# Allegro board balance_new.brd
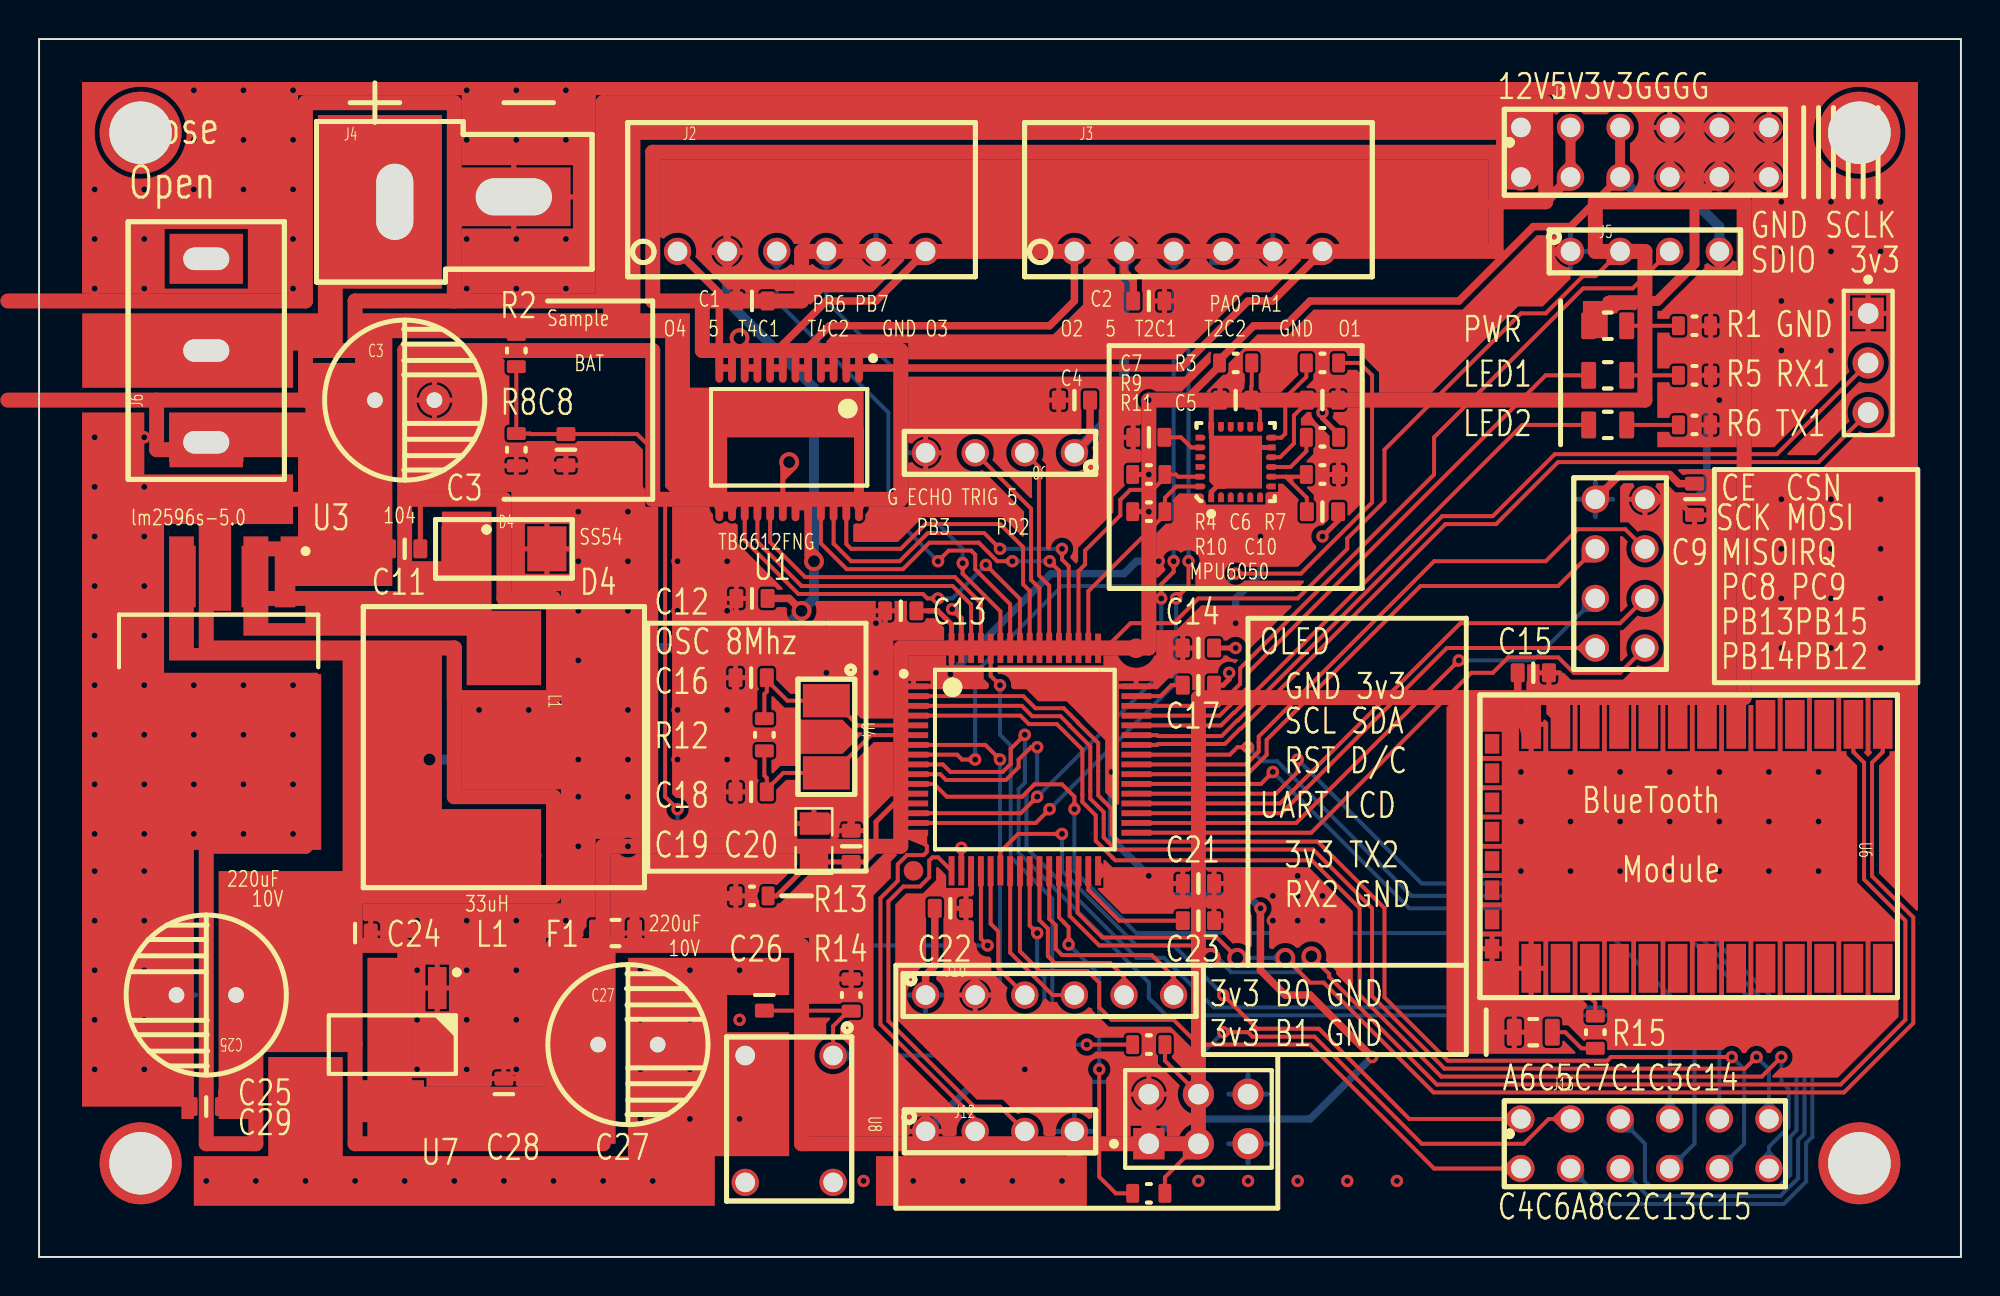
[diagram p0: board, top side]
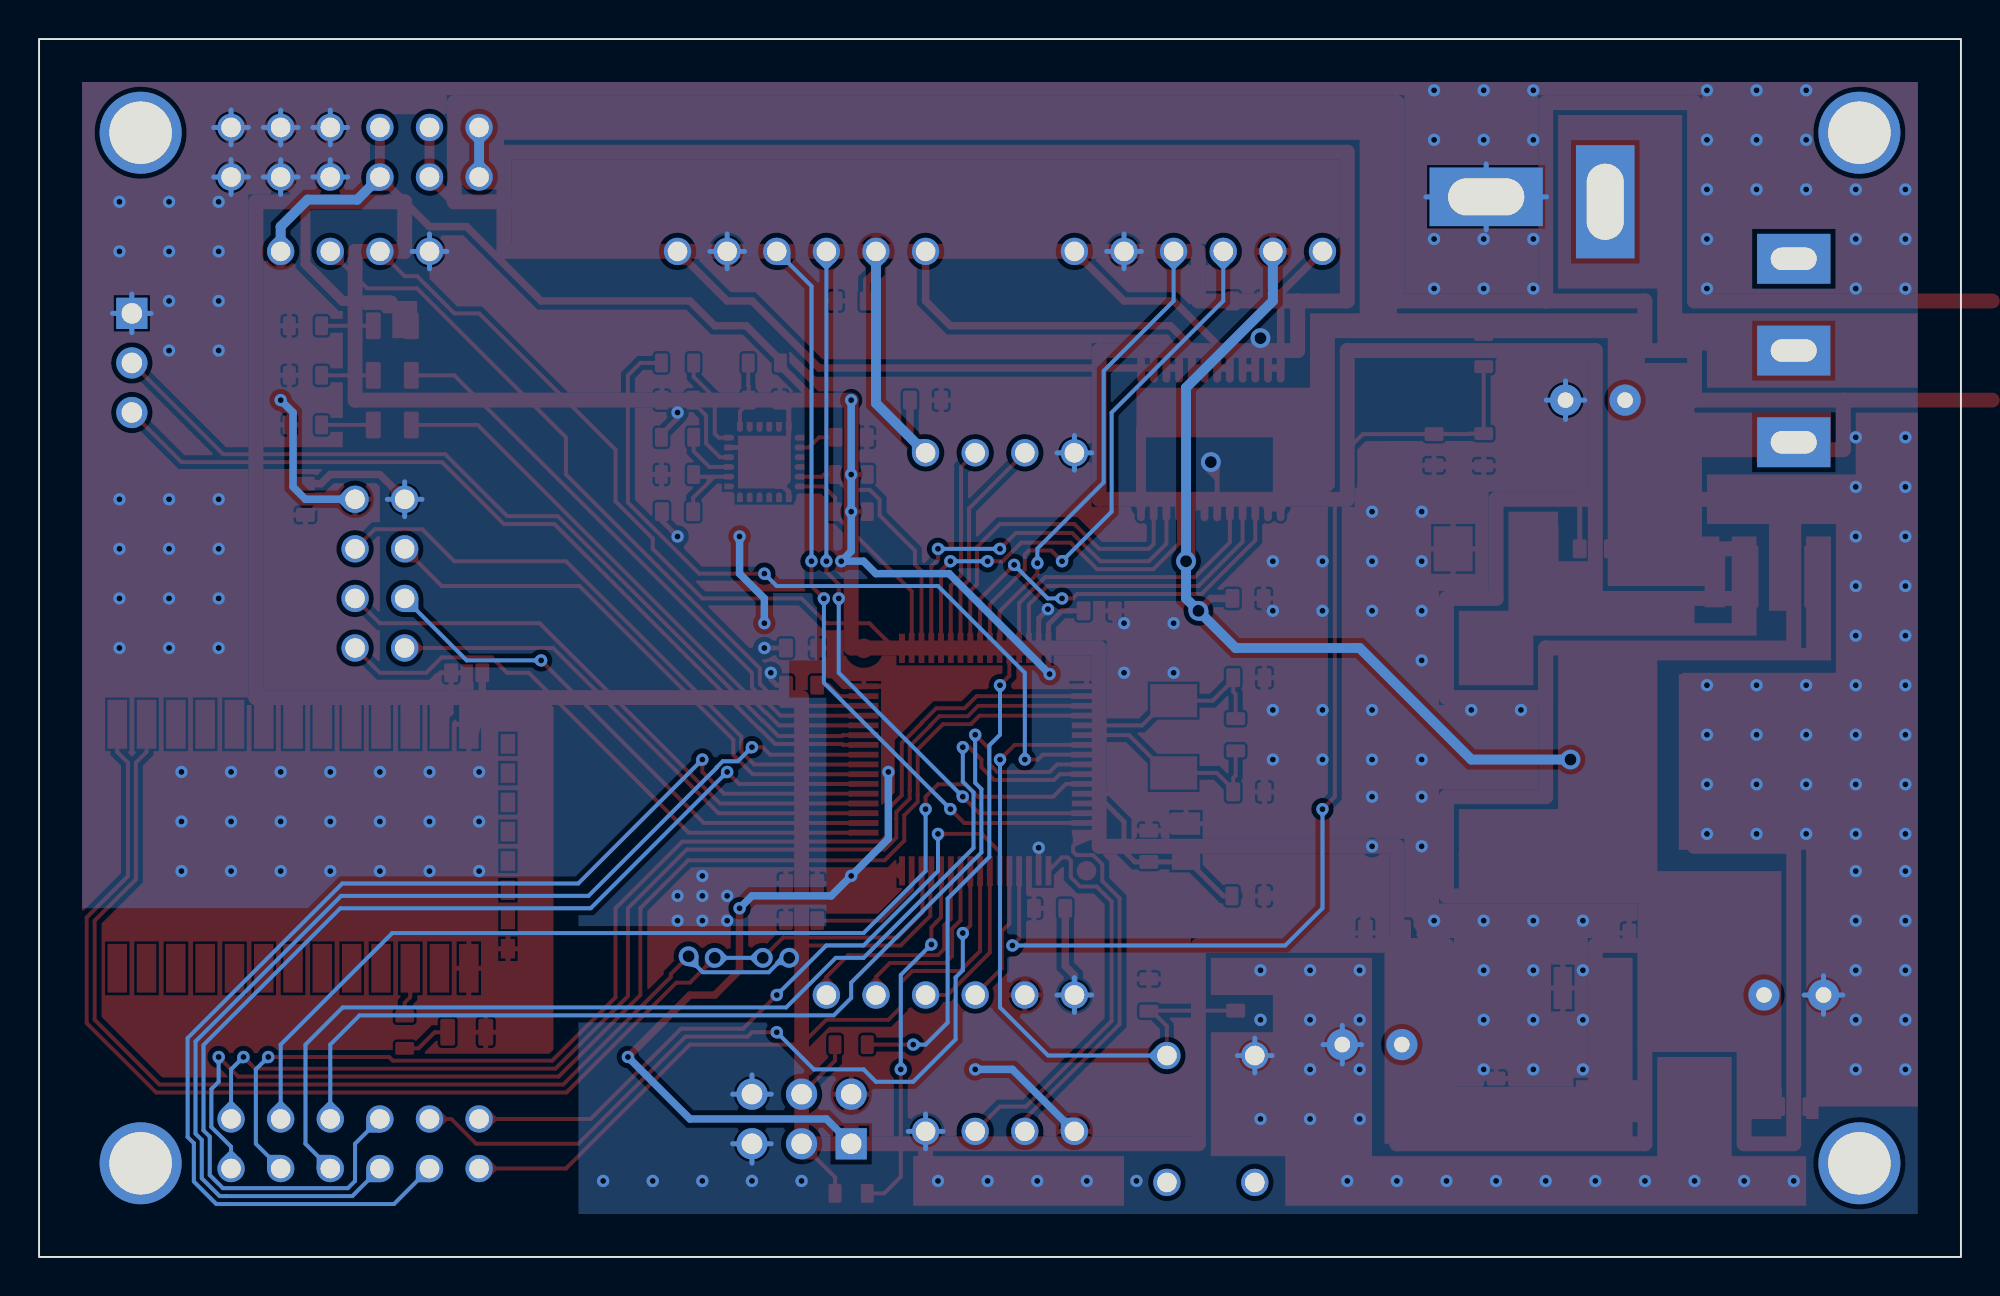
[diagram p1: board, bottom side, seen from below]

Outline 98.4 x 62.4 mm; copper layers: TOP, BOTTOM. Coordinates in mm from the lower left corner of the outline.
Outline path: rectangle 0,0 98.4,62.4

## Design rules (mm)
net group USART1: nets USART1_RX USART1_TX
net group USART2: nets USART2_RX USART2_TX
net group USART3: nets USART3_RX USART3_TX

## Placement (name value [footprint] x y rotation side)
C1  104  [CAP0603]  36.5 48.98 180 top
C2  104  [CAP0603]  56.82 48.98 180 top
C3  220uF 25V  [CAP_220UF_3_048]  18.72 43.9 0 top
C4  104  [CAP0603]  53.01 43.9 180 top
C5  104  [CAP0603]  61.27 43.9 180 top
C6  104  [CAP0603]  65.71 43.9 0 top
C7  2.2nF  [CAP0603]  56.82 41.99 0 top
C8  104  [CAP0603]  26.98 41.36 270 top
C9  104  [CAP0603]  84.76 38.82 270 top
C10  104  [CAP0603]  65.71 38.19 0 top
C11  104  [CAP0603]  18.72 36.28 0 top
C12  104  [CAP0603]  36.5 33.74 180 top
C13  104  [CAP0603]  44.12 33.1 180 top
C14  104  [CAP0603]  59.36 31.2 0 top
C15  104  [CAP0603]  76.5 29.93 180 top
C16  22pF  [CAP0603]  36.46 29.68 180 top
C17  225  [CAP0603]  59.36 29.29 0 top
C18  22pF  [CAP0603]  36.46 23.83 180 top
C19  10uF  [CAP0805]  39.68 20.41 90 top
C20  104  [CAP0603]  41.58 21.04 90 top
C21  104  [CAP0603]  59.36 19.13 0 top
C22  104  [CAP0603]  46.66 17.86 180 top
C23  225  [CAP0603]  59.36 17.23 0 top
C24  104  [CAP0603]  16.18 16.59 0 top
C25  220uF 10V  [CAP_220UF_3_048]  8.56 13.42 180 top
C26  104  [CAP0603]  37.14 13.42 90 top
C27  220uF 10V  [CAP_220UF_3_048]  30.15 10.88 0 top
C28  104  [CAP0603]  23.8 8.34 90 top
C29  104  [CAP0603]  8.56 7.7 180 top
D1  LED  [RES0805]  80.31 47.71 0 top
D2  LED  [RES0805]  80.31 45.17 0 top
D3  LED  [RES0805]  80.31 42.63 0 top
D4  ES2D  [SMB-DO_214AA]  23.8 36.28 0 top
D5  LED  [RES0805]  76.5 11.52 0 top
F1  500mA 6V  [RES0805]  29.52 16.59 180 top
J1  HEADER 6X2  [HEADER6X2_254]  82.22 56.6 0 top
J2  encoder 1  [HEADER6X1_XH254_CU]  39.04 51.52 0 top
J3  encoder 2  [HEADER6X1_XH254_CU]  59.36 51.52 0 top
J4  HEADER 2  [BATTERYJACK_2P]  21.26 54.06 0 top
J5  HEADER 4  [HEADER4X1_254]  82.22 51.52 0 top
J6  SW  [SWITCH_6A125V]  8.56 46.44 90 top
J7  HEADER 3  [HEADER3X1_254]  93.65 48.34 270 top
J8  HEADER 4  [HEADER4X1_254]  49.2 41.2 180 top
J9  nRF24L01  [HEADER2X4_254]  79.68 38.82 270 top
J10  HEADER 6  [HEADER6X1_254]  51.74 13.42 0 top
J11  HEADER 3X2  [HEADER3X2_254]  56.82 5.8 0 top
J12  UART LCD  [HEADER4X1_254]  49.2 6.43 0 top
J13  HEADER 6X2  [HEADER6X2_254]  82.22 5.8 0 top
L1  33uH  [TDK33UH_SLF12575]  23.8 26.12 270 top
NOREF  -  [unnamed]  93.2 4.8 0 top
NOREF#2  -  [unnamed]  5.2 57.6 0 top
NOREF#3  -  [unnamed]  93.2 57.6 0 top
NOREF#4  -  [unnamed]  5.2 4.8 0 top
NOREF#5  -  [#2]  0 62.4 0 top
NOREF#6  -  [#2]  0 0 90 top
R1  1K  [RES0603]  84.76 47.71 180 top
R2  10K  [RES0603]  24.44 46.44 270 top
R3  10R  [RES0603]  61.27 45.8 180 top
R4  1K  [RES0603]  65.71 45.8 0 top
R5  1K  [RES0603]  84.76 45.17 180 top
R6  1K  [RES0603]  84.76 42.63 180 top
R7  10K  [RES0603]  65.71 41.99 0 top
R8  1.5K  [RES0603]  24.44 41.36 270 top
R9  10K  [RES0603]  56.82 40.09 0 top
R10  10R  [RES0603]  65.71 40.09 0 top
R11  10K  [RES0603]  56.82 38.19 0 top
R12  1MR  [RES0603]  37.14 26.75 270 top
R13  10R  [RES0603]  36.5 18.5 180 top
R14  10K  [RES0603]  41.58 13.42 90 top
R15  1.5K  [RES0603]  79.68 11.52 270 top
R16  10K  [RES0603]  56.82 10.88 0 top
R17  10K  [RES0603]  56.82 3.26 180 top
U1  TB6612FNG  [TB6612FNG_SSOP24]  38.41 41.99 270 top
U2  MPU6050  [MPU6050_QFN24]  61.27 40.73 90 top
U3  LM2596S-5.0  [LM2596S_TO263]  9.2 28.66 270 top
U4  8MHz  [OSC_2PIN_20PF_5032]  40.31 26.65 270 top
U5  STM32F405RGT6  [STM32F405RGT6_LQFP64]  50.47 25.48 0 top
U6  BLUETOOTH  [BLUETOOTH_MODULE]  85.4 21.04 270 top
U7  AMS1117  [AMS1117_SOT223]  18.09 10.88 270 top
U8  KEY  [KEY6X6X5]  38.41 7.07 270 top

## Library data of the parts
C1 C2 C4-C18 C20-C24 C26 C28 C29 = CAP NP: Tolerance: RichardLC; User Part Number: pn
C3 C25 C27 = CAP
C19 = CAP NP
D1-D3 = LED: Tolerance: RichardLC; User Part Number: partnum
D4 = DIODE
D5 = LED_0: Tolerance: RichardLC; User Part Number: partnum
F1 = FUSE: Tolerance: RichardLC; User Part Number: partnum
J1 J13 = HEADER 6X2
J2 J3 J10 = HEADER 6
J4 = HEADER 2
J5 J8 J12 = HEADER 4
J6 J7 = HEADER 3
J9 = HEADER 4X2
J11 = HEADER 3X2
L1 = INDUCTOR
R1-R17 = R: Tolerance: RichardLC; User Part Number: partnum
U1 = TB6612FNG
U2 = MPU6050
U3 = LM2596S-5_0.0
U4 = XTAL-49S
U5 = STM32F405RGT6
U6 = BLUETOOTH
U7 = AMS1117
U8 = KEY6x6x5

## Footprints (pads in the part's own frame, mm; a bottom-side part is the same pattern mirrored in y, then rotated)
AMS1117_SOT223
  rect 2.15x0.95 smd: 1(-2.9,2.3) 2(-2.9,0) 3(-2.9,-2.3)
  rect 2.15x3.25 smd: 4(2.9,0)
BATTERYJACK_2P
  rect 3x5.8 hole 1.9x3.9: 1(-3.048,0)
  rect 5.8x3 hole 3.9x1.9: 2(3.048,0.254)
BLUETOOTH_MODULE
  rect 2.5x1 smd: 1(-6.25,9) 2(-6.25,7.5) 3(-6.25,6) 4(-6.25,4.5) 5(-6.25,3) 6(-6.25,1.5) 7(-6.25,0) 8(-6.25,-1.5) 9(-6.25,-3) 10(-6.25,-4.5) 11(-6.25,-6) 12(-6.25,-7.5) 13(-6.25,-9) 22(6.25,-9) 23(6.25,-7.5) 24(6.25,-6) 25(6.25,-4.5) 26(6.25,-3) 27(6.25,-1.5) 28(6.25,0) 29(6.25,1.5) 30(6.25,3) 31(6.25,4.5) 32(6.25,6) 33(6.25,7.5) 34(6.25,9)
  rect 1x0.738 smd: 14(-5.25,-11) 15(-3.75,-11) 16(-2.25,-11) 17(-0.75,-11) 18(0.75,-11) 19(2.25,-11) 20(3.75,-11) 21(5.25,-11)
CAP0603
  custom 0.712x0.966 smd: 1(-0.8,0) 2(0.8,0)
CAP0805
  rect 1.143x1.448 smd: 1(0,0) 2(1.8,0)
CAP_220UF_3_048
  round 1.6 hole 0.8: 1(-1.524,0) 2(1.524,0)
HEADER2X4_254
  round 1.4 hole 1: 1(0,0) 2(0,2.54) 3(2.54,0) 4(2.54,2.54) 5(5.08,0) 6(5.08,2.54) 7(7.62,0) 8(7.62,2.54)
HEADER3X1_254
  rect 1.6x1.6 hole 1.05: 1(0,0)
  round 1.6 hole 1.05: 2(2.54,0) 3(5.08,0)
HEADER3X2_254
  rect 1.6x1.6 hole 1.05: 1(0,0)
  round 1.6 hole 1.05: 2(0,2.54) 3(2.54,0) 4(2.54,2.54) 5(5.08,0) 6(5.08,2.54)
HEADER4X1_254
  round 1.4 hole 1: 1(-3.81,0) 2(-1.27,0) 3(1.27,0) 4(3.81,0)
HEADER6X1_254
  round 1.4 hole 1: 1(-6.35,0) 2(-3.81,0) 3(-1.27,0) 4(1.27,0) 5(3.81,0) 6(6.35,0)
HEADER6X1_XH254_CU
  round 1.4 hole 1: 1(-6.35,0) 2(-3.81,0) 3(-1.27,0) 4(1.27,0) 5(3.81,0) 6(6.35,0)
HEADER6X2_254
  round 1.4 hole 1: 1(-6.35,1.27) 2(-6.35,-1.27) 3(-3.81,1.27) 4(-3.81,-1.27) 5(-1.27,1.27) 6(-1.27,-1.27) 7(1.27,1.27) 8(1.27,-1.27) 9(3.81,1.27) 10(3.81,-1.27) 11(6.35,1.27) 12(6.35,-1.27)
KEY6X6X5
  round 1.4 hole 1: 1(-3.25,2.25) 2(-3.25,-2.25) 3(3.25,2.25) 4(3.25,-2.25)
LM2596S_TO263
  rect 3.15x1.05 smd: 1(-6.2,3.4) 2(-6.2,1.7) 3(-6.2,0) 4(-6.2,-1.7) 5(-6.2,-3.4)
  rect 9x10.5 smd: 6(3.3,0)
MPU6050_QFN24
  custom 0.5x0.3 smd: 1(-1.8,1.25) 2(-1.8,0.75) 3(-1.8,0.25) 4(-1.8,-0.25) 5(-1.8,-0.75) 6(-1.8,-1.25) 13(1.8,-1.25) 14(1.8,-0.75) 15(1.8,-0.25) 16(1.8,0.25) 17(1.8,0.75) 18(1.8,1.25)
  custom 0.3x0.5 smd: 7(-1.25,-1.8) 8(-0.75,-1.8) 9(-0.25,-1.8) 10(0.25,-1.8) 11(0.75,-1.8) 12(1.25,-1.8) 19(1.25,1.8) 20(0.75,1.8) 21(0.25,1.8) 22(-0.25,1.8) 23(-0.75,1.8) 24(-1.25,1.8)
  custom 2.7x2.7 smd: 25(0,0)
OSC_2PIN_20PF_5032
  rect 1.7x2.4 smd: 1(-1.85,0) 2(1.85,0)
RES0603
  custom 0.66x0.966 smd: 1(-0.825,0) 2(0.825,0)
RES0805
  custom 0.762x1.372 smd: 1(-0.975,0) 2(0.975,0)
SMB-DO_214AA
  rect 2x2.3 smd: 1(-2.2,0) 2(2.2,0)
STM32F405RGT6_LQFP64
  round 1 smd: (-5.7,-5.7) (5.7,5.7)
  rect 1.5x0.3 smd: 1(-5.7,3.75) 2(-5.7,3.25) 3(-5.7,2.75) 4(-5.7,2.25) 5(-5.7,1.75) 6(-5.7,1.25) 7(-5.7,0.75) 8(-5.7,0.25) 9(-5.7,-0.25) 10(-5.7,-0.75) 11(-5.7,-1.25) 12(-5.7,-1.75) 13(-5.7,-2.25) 14(-5.7,-2.75) 15(-5.7,-3.25) 16(-5.7,-3.75) 33(5.7,-3.75) 34(5.7,-3.25) 35(5.7,-2.75) 36(5.7,-2.25) 37(5.7,-1.75) 38(5.7,-1.25) 39(5.7,-0.75) 40(5.7,-0.25) 41(5.7,0.25) 42(5.7,0.75) 43(5.7,1.25) 44(5.7,1.75) 45(5.7,2.25) 46(5.7,2.75) 47(5.7,3.25) 48(5.7,3.75)
  rect 0.3x1.5 smd: 17(-3.75,-5.7) 18(-3.25,-5.7) 19(-2.75,-5.7) 20(-2.25,-5.7) 21(-1.75,-5.7) 22(-1.25,-5.7) 23(-0.75,-5.7) 24(-0.25,-5.7) 25(0.25,-5.7) 26(0.75,-5.7) 27(1.25,-5.7) 28(1.75,-5.7) 29(2.25,-5.7) 30(2.75,-5.7) 31(3.25,-5.7) 32(3.75,-5.7) 49(3.75,5.7) 50(3.25,5.7) 51(2.75,5.7) 52(2.25,5.7) 53(1.75,5.7) 54(1.25,5.7) 55(0.75,5.7) 56(0.25,5.7) 57(-0.25,5.7) 58(-0.75,5.7) 59(-1.25,5.7) 60(-1.75,5.7) 61(-2.25,5.7) 62(-2.75,5.7) 63(-3.25,5.7) 64(-3.75,5.7)
SWITCH_6A125V
  rect 2.554x3.754 hole 1.154x2.354: 1(-4.7,0) 2(0,0) 3(4.7,0)
TB6612FNG_SSOP24
  oval 1.5x0.4 smd: 1(-3.55,3.575) 2(-3.55,2.925) 3(-3.55,2.275) 4(-3.55,1.625) 5(-3.55,0.975) 6(-3.55,0.325) 7(-3.55,-0.325) 8(-3.55,-0.975) 9(-3.55,-1.625) 10(-3.55,-2.275) 11(-3.55,-2.925) 12(-3.55,-3.575) 13(3.55,-3.575) 14(3.55,-2.925) 15(3.55,-2.275) 16(3.55,-1.625) 17(3.55,-0.975) 18(3.55,-0.325) 19(3.55,0.325) 20(3.55,0.975) 21(3.55,1.625) 22(3.55,2.275) 23(3.55,2.925) 24(3.55,3.575)
TDK33UH_SLF12575
  rect 2.6x3.2 smd: 1(-5.55,0) 2(5.55,0)
unnamed
  round 4.2 hole 3.2 unplated: (0,0)

## Nets
3V3: C9.2 C13.1 C14.1 C15.1 C21.1 C22.1 F1.1 J1.5 J1.6 J5.4 J9.2 J10.2 J11.1 J11.2 J12.1 R1.1 R3.2 R5.1 R6.1 R9.1 R10.2 R11.1 R13.2 R14.2 U5.1(VBAT) U5.19(VDD1) U5.32(VDD2) U5.48(VDD3) U5.64(VDD4) U6.12(VCC3.3)
5V: C1.2 C2.2 C4.1 C12.1 C24.1 C25.1 C29.1 J1.3 J1.4 J2.2 J3.2 J8.1 L1.2 U1.19(STBY) U1.20(VCC) U3.4(FB) U7.3(IN)
12V: C3.1 C11.1 J1.1 J1.2 J6.1 R2.1 U1.13(VM2) U1.14(VM3) U1.24(VM1) U3.1(IN)
GND: C1.1 C2.1 C3.2 C4.2 C5.2 C6.2 C7.1 C8.2 C9.1 C10.2 C11.2 C12.2 C13.2 C14.2 C15.2 C16.2 C17.2 C18.2 C19.2 C20.2 C21.2 C22.2 C23.2 C24.2 C25.2 C26.2 C27.2 C28.2 C29.2 D1.1(CATHODE) D4.2(A) D5.1(CATHODE) J1.7 J1.8 J1.9 J1.10 J1.11 J1.12 J2.5 J3.5 J4.2 J5.1 J7.1 J8.4 J9.1 J10.1 J11.5 J11.6 J12.4 R7.2 R8.2 U1.3(PGND11) U1.4(PGND12) U1.9(PGND21) U1.10(PGND22) U1.18(GND) U2.1(CLKIN) U2.11(FSYNC) U2.18(GND) U2.25(S_GND) U3.3(GND) U3.5(\\O\N/OFF) U3.6(SH_GND) U5.12(VSSA) U5.18(VSS1) U5.63(VSS2) U6.13(GND1) U6.21(GND2) U6.22(GND3) U7.1(GND) U8.2(OUT1)
VBAT: J4.1 J6.2
BOOT0: R16.1 U5.60(BOOT0)
BOOT1: R17.2 U5.28(PB2)
MPU_INT: R4.2 U5.8(PC0)
MPU_SCL: R9.2 U2.23(SCL) U5.51(PC10)
MPU_SDA: R11.2 U2.24(SDA) U5.50(PA15)
NRF_CE: J9.3 U5.39(PC8)
NRF_CSN: J9.4 U5.40(PC9)
NRF_IRQ: J9.8 U5.33(PB12)
NRF_MISO: J9.7 U5.35(PB14)
NRF_MOSI: J9.6 U5.36(PB15)
NRF_SCK: J9.5 U5.34(PB13)
O1: J3.6 U1.1(AO11) U1.2(AO12)
O2: J3.1 U1.5(AO21) U1.6(AO22)
O3: J2.6 U1.7(BO21) U1.8(BO22)
O4: J2.1 U1.11(BO11) U1.12(BO12)
OLED_D/C: J10.6 U5.27(PB1)
OLED_RST: J10.5 U5.26(PB0)
OLED_SCL: J10.3 U5.21(PA5)
OLED_SDA: J10.4 U5.23(PA7)
OSC_IN: C16.1 R12.1 U4.1(IN) U5.5(PH0)
OSC_OUT: C18.1 R12.2 U4.2(OUT) U5.6(PH1)
PA0_TIM2CH1: J3.3 U5.14(PA0_WKUP)
PA1_TIM2CH2: J3.4 U5.15(PA1)
PA4_BATVAL: C8.1 R2.2 R8.1 U5.20(PA4)
PA6: J13.1 U5.22(PA6)
PA8: J13.6 U5.41(PA8)
PA11_LED2: D3.1(CATHODE) U5.44(PA11)
PA12_LED1: D2.1(CATHODE) U5.45(PA12)
PB3_ECHO: J8.3 U5.55(PB3)
PB4_PWMA: U1.23(PWMA) U5.56(PB4)
PB5_PWMB: U1.15(PWMB) U5.57(PB5)
PB6_TIM4CH1: J2.3 U5.58(PB6)
PB7_TIM4CH2: J2.4 U5.59(PB7)
PB8_BIN1: U1.17(BIN1) U5.61(PB8)
PB9_BIN2: U1.16(BIN2) U5.62(PB9)
PC1: J13.7 U5.9(PC1)
PC2: J13.8 U5.10(PC2)
PC3: J13.9 U5.11(PC3)
PC4: J13.2 U5.24(PC4)
PC5: J13.3 U5.25(PC5)
PC6: J13.4 U5.37(PC6)
PC7: J13.5 U5.38(PC7)
PC11_AIN2: U1.22(AIN2) U5.52(PC11)
PC12_AIN1: U1.21(AIN1) U5.53(PC12)
PC13: J13.10 U5.2(PC13)
PC14: J13.11 U5.3(PC14)
PC15: J13.12 U5.4(PC15)
PD2_TRIG: J8.2 U5.54(PD2)
RESET: C26.1 R14.1 U5.7(NRST) U8.1(IN1)
SWCLK: J5.2 U5.49(PA14)
SWDIO: J5.3 U5.46(PA13)
USART1_RX: J7.2 U5.43(PA10)
USART1_TX: J7.3 U5.42(PA9)
USART2_RX: J12.3 U5.17(PA3)
USART2_TX: J12.2 U5.16(PA2)
USART3_RX: U5.30(PB11) U6.1(UART_TX)
USART3_TX: U5.29(PB10) U6.2(UART_RX)
N02049: D4.1(K) L1.1 U3.2(OUT)
N02945: C27.1 C28.1 F1.2 U7.2(OUT1) U7.4(OUT2)
N04107: R15.1 U6.24(P12)
N04150: D5.2(ANODE) R15.2
N05925: R7.1 U2.9(AD0)
N05988: C6.1 U2.10(REGOUT)
N06085: C10.1 R10.1 U2.8(VLOGIC)
N06193: C5.1 R3.1 U2.13(VDD)
N06468: R4.1 U2.12(INT)
N06759: C7.2 U2.20(CPOUT)
N13789: J11.4 R16.2
N13793: J11.3 R17.1
N14492: C19.1 C20.1 R13.1 U5.13(VDDA)
N14997: C23.1 U5.31(VCAP_1)
N15072: C17.1 U5.47(VCAP_2)
N21101: D1.2(ANODE) R1.2
N21105: D2.2(ANODE) R5.2
N21109: D3.2(ANODE) R6.2

Pads without a net: J6 3; U2 2 3 4 5 6 7 14 15 16 17 19 21 22; U6 3 4 5 6 7 8 9 10 11 14 15 16 17 18 19 20 23 25 26 27 28 29 30 31 32 33 34; U8 3 4

## Via types
v1: diameter 0.635, hole 0.305, TOP to BOTTOM, 247 vias
v2: diameter 1.016, hole 0.61, TOP to BOTTOM, 9 vias

## Routing (per net, layer and track width the routed paths; a pad name or vN(x,y) marks a point on that pad's centre or on a via; arc(x,y) is an arc through that point)
3V3: length 180.3
  TOP w0.254: 85.59,42.63 85.59,43.3 ; 85.59,42.63 85.59,41.96 ; 85.59,42.63 85.06,42.63 ; 85.59,42.63 86.11,42.63 ; 81.33,38.82 J9.2 ; J9.2 83.83,38.82 84.63,38.02 C9.2 ; J9.2 82.22,37.93 ; 85.06,47.71 85.59,47.71 ; 85.59,47.71 85.59,48.38 ; 85.59,47.71 85.59,47.04 ; 85.59,47.71 86.11,47.71 ; 29.92,16.59 F1.1 31.06,16.59 ; C14.1 59.11,31.2 ; C14.1 57.95,31.2 57.46,30.71 57.46,29.49 57.2,29.23 U5.48 ; C14.1 58.56,30.53 ; C14.1 58.56,31.87 ; v1(56.82,40.09) R9.1 ; R11.1 v1(56.82,38.19) ; C9.2 85.43,38.02 ; C9.2 84.76,37.47 ; 76.76,29.93 C15.1 ; C15.1 77.85,29.93 ; C15.1 77.31,27.88 U6.12 ; 44.5,6.43 J12.1 ; J12.1 45.39,7.7 ; J12.1 46.28,6.43 ; R13.2 36.2,18.5 ; R13.2 35.68,19.17 ; R13.2 35.68,17.83 ; J10.2 48.82,13.42 ; J10.2 47.93,15.15 ; J10.2 47.04,13.42 ; J10.2 47.93,12.53 ; R14.2 41.58,14.77 ; R14.2 41.58,13.72 ; R14.2 40.91,14.25 ; R14.2 42.25,14.25 ; 85.59,45.17 86.11,45.17 ; 85.59,45.17 85.59,44.5 ; 85.59,45.17 85.59,45.84 ; 85.59,45.17 85.06,45.17 ; C21.1 58.56,19.81 ; C21.1 57.46,19.13 ; C21.1 58.56,18.46 ; 45.71,29.23 U5.1 44.77,29.58 ; 46.72,32.19 46.72,32.19 46.72,32.4 ; 46.72,32.19 46.72,32.4 ; 46.72,32.19 46.72,29.99 ; 46.72,32.4 46.72,32.41 46.02,33.1 ; U5.19 47.72,18.92 47.7,18.91 47.7,18.9 47.46,18.66 C22.1 ; 45.53,33.1 46.02,33.1 ; 45.53,33.1 C13.1 ; 45.53,33.1 46.02,33.1 ; C22.1 47.46,16.76 ; C22.1 46.66,17.86 ; 66.01,40.09 R10.2 ; R10.2 66.53,40.76 ; R10.2 67.06,40.09 ; R10.2 66.53,39.42 ; J11.2 57.81,8.34 ; J11.2 55.83,8.34 ; J11.2 56.82,9.33 ; J5.4 86.03,50.57 ; U5.48 55.23,29.23 ; U5.48 56.17,29.58 ; 54.62,19.79 U5.32
  TOP w0.381: J1.6 78.41,52.79 76.5,52.79 72.7,48.98 65.08,48.98 63.81,47.71 62.19,47.71 60.44,45.96 R3.2 60.44,45.65 58.69,43.9 v1(56.82,43.9) ; v1(62.54,17.86) 62.54,14.69 63.81,13.42 65.08,13.42 v1(68.25,10.25)
  TOP w0.508: R13.2 34.59,18.5 ; J1.6 J1.5 ; F1.1 30.49,18.5
  TOP w0.762: J11.2 J11.1
  BOTTOM w0.381: v1(50.47,9.61) 48.57,9.61 J12.1 ; v1(68.25,10.25) 65.08,7.07 58.09,7.07 J11.1 ; v1(61.27,32.47) 61.27,33.74 62.54,35.01 v1(62.54,36.91) ; v1(56.82,43.9) v1(56.82,40.09) v1(56.82,38.19) 56.82,36.15 v1(57.33,35.64) 56.19,35.64 55.55,35.01 51.81,35.01 v1(46.66,29.86) ; J9.2 84.76,38.82 85.4,39.45 85.4,43.27 v1(86.03,43.9) ; v1(62.54,17.86) 61.9,18.5 57.84,18.5 v1(56.82,19.52) 54.92,21.43 v1(54.92,24.85)
  BOTTOM w0.508: J1.6 82.11,54.17 84.65,54.17 86.03,52.79 J5.4
5V: length 95.3
  TOP w0.381: v2(39.04,33.1) 38.41,33.74 C12.1 ; J2.2 36.12,51.52 ; J2.2 35.23,52.41 ; J2.2 34.34,51.52 ; J2.2 35.23,50.5 35.7,50.03 C1.2 ; L1.2 23.8,22.31 ; L1.2 25.54,20.57 ; L1.2 20.79,20.57 ; 9.36,8.51 C29.1 9.83,7.7 ; C4.1 53.81,42 J8.1 ; U1.19 U1.20 39.38,35.94 v2(39.68,35.64) ; C2.2 56.02,50.03 55.55,50.5 J3.2 55.55,54.06 ; C25.1 10.08,12.4 ; C25.1 10.08,14.94 ; C25.1 11.73,13.42
  TOP w0.508: 71.52,53.97 77.04,53.97 77.68,54.61 77.69,54.61 J1.4 J1.3
  BOTTOM w0.508: J8.1 55.55,43.74 J3.2 ; v2(19.99,25.48) 25.07,25.48 30.79,31.2 37.14,31.2 v2(39.04,33.1) 39.68,33.74 v2(39.68,35.64) 39.68,44.53 35.23,48.98 J2.2
12V: length 10.3
  TOP w0.508: U1.24 41.98,42.39 ; U1.14 U1.13 34.83,40.09
  TOP w0.762: 12.6,34.86 14.12,34.86
  BOTTOM w0.508: J1.1 J1.2
GND: length 246.2
  TOP w0.254: 51.66,43.9 C4.2 ; C4.2 52.76,43.9 ; C4.2 52.21,44.57 ; C4.2 52.21,43.23 ; U2.25 61.27,40.09 60.66,39.48 60.3,39.48 60.02,39.2 60.02,39.2 60.02,39.19 60.02,38.92 ; U2.25 62.02,41.48 U2.11 ; U2.25 60.02,41.97 60.02,42.25 60.02,42.26 60.02,43.45 C5.2 60.47,44.85 ; 26.98,40.01 C8.2 ; C8.2 26.98,41.11 ; C8.2 27.65,40.56 ; 75.7,14.79 U6.22 ; U6.22 76.4,13.35 ; U6.22 77.09,14.79 ; U6.22 76.4,16.23 ; 93.65,47.35 J7.1 ; J7.1 93.65,49.34 ; J7.1 94.64,48.34 ; J7.1 92.66,48.34 ; C18.2 36.21,23.83 ; C18.2 35.66,23.16 ; C18.2 35.11,23.83 ; 40.91,21.84 C20.2 42.25,21.84 ; 75.7,27.29 U6.13 ; U6.13 76.4,25.85 ; U6.13 77.09,27.29 ; J5.1 77.52,51.52 ; 20.24,42.91 C3.2 ; C3.2 21.23,43.9 ; C3.2 20.24,44.89 ; C3.2 19.25,43.9 ; 45.39,40.31 J8.4 ; J8.4 46.28,41.2 ; J8.4 45.39,42.09 ; C2.1 57.62,49.65 ; C2.1 58.17,48.98 ; C2.1 57.62,48.31 ; C2.1 57.07,48.98 ; U5.18 v1(47.22,20.96) ; C16.2 35.66,30.35 ; C16.2 36.21,29.68 ; C16.2 35.11,29.68 ; J1.11 88.57,58.76 ; J1.11 J1.9 ; J1.11 89.46,57.87 ; J1.11 J1.12 ; C17.2 60.63,29.29 60.93,29.6 v1(60.93,29.93) ; 60.16,17.9 C23.2 60.71,17.23 ; J1.9 J1.10 ; J1.9 J1.7 ; 20.39,13.78 20.39,15.05 ; 20.39,13.78 21.05,13.78 ; 20.39,13.78 20.39,12.51 ; 20.39,13.78 19.72,13.78 ; 24.31,52.62 J4.2 ; J4.2 24.31,56 ; J4.2 27.4,54.31 ; U6.21 74.4,16.48 ; U6.21 73.84,15.79 ; U6.21 74.4,15.1 ; U6.21 74.95,15.79 ; J1.7 83.49,58.76 ; J1.7 J1.8 J1.10 ; J1.7 82.6,57.87 ; C13.2 43.87,33.1 ; C13.2 43.32,32.43 ; C13.2 42.77,33.1 ; C28.2 23.8,9.69 ; C28.2 24.47,9.14 ; C28.2 23.13,9.14 ; 74.96,11.52 D5.1 ; D5.1 76.1,11.52 ; D5.1 75.53,10.64 ; D5.1 75.53,12.39 ; U1.18 38.08,40.4 v2(38.41,40.73) ; 24.81,36.28 D4.2 ; D4.2 27.19,36.28 ; D4.2 26,34.94 ; D4.2 26,37.62 ; v1(65.71,36.91) 66.51,37.71 C10.2 ; 55.47,41.99 C7.1 ; C7.1 56.02,42.67 ; C7.1 56.02,41.32 ; 17.53,16.59 C24.2 16.98,17.27 ; J1.10 J1.12 ; 47.22,31.18 47.22,32.72 v1(46.75,33.19) ; v1(65.71,43.27) 65.71,42.97 66.53,42.15 R7.2 ; 24.44,40.01 R8.2 ; R8.2 24.44,41.06 ; R8.2 23.76,40.53 ; 35.7,33.07 C12.2 ; C12.2 35.7,34.41 ; C12.2 35.15,33.74 ; C12.2 36.25,33.74 ; J1.12 89.46,55.33 ; J1.12 88.57,54.44 ; 38.76,22.2 C19.2 39.68,22.97 ; C21.2 60.16,19.81 ; C21.2 60.16,18.46 ; C21.2 60.71,19.13 ; C11.2 19.52,40.09 ; C6.2 66.51,44.85 ; C14.2 v1(61.27,31.2) ; U5.12 43.64,23.73
  TOP w0.381: U1.9 U1.10 36.13,46.81 v2(35.87,47.08) ; J10.1 45.39,14.44 45.86,14.91 C22.2 ; U6.13 75.7,27.98 C15.2 ; C20.2 41.58,22.95 ; C16.2 35.66,28.86 ; U1.4 U1.3 40.68,47.08 ; J9.1 80.95,40.09 83.49,40.09 83.96,39.62 C9.1 ; C18.2 35.66,24.64 ; R8.2 26.15,40.53 26.17,40.56 C8.2 ; C19.2 40.84,22.2
  TOP w0.508: C1.1 39.04,48.98 39.68,49.61 ; J2.5 42.85,50.25 ; 80.3,48.98 82.86,48.98 84.76,50.88 84.76,54.06 J1.10 ; D1.1 79.34,48.69 ; J3.5 63.17,50.25
  TOP w0.762: J12.4 53.01,3.89
  TOP w1.27: U3.6 2.97,25.36
  BOTTOM w0.254: 41.96,51.52 J2.5 ; J2.5 42.85,52.41 ; J2.5 42.85,50.63 ; J2.5 43.74,51.52 ; 87.68,57.87 J1.11 ; J1.11 88.57,58.76 ; J1.11 89.46,57.87 ; J1.11 88.57,56.98 ; 85.14,57.87 J1.9 ; J1.9 86.92,57.87 ; J1.9 86.03,58.76 ; J1.9 86.03,56.98 ; 35.26,10.32 U8.2 ; U8.2 37.05,10.32 ; U8.2 36.16,9.43 ; U8.2 36.16,11.21 ; J1.8 83.49,56.22 ; J1.8 82.6,55.33 ; J1.8 84.38,55.33 ; J4.2 27.4,54.31 ; J4.2 24.31,56 ; J4.2 24.31,52.62 ; J4.2 21.22,54.31 ; 60.91,5.8 J11.5 ; J11.5 61.9,4.81 ; J11.5 62.89,5.8 ; 78.41,50.63 J5.1 ; J5.1 78.41,52.41 ; J5.1 77.52,51.52 ; J5.1 79.3,51.52 ; 63.17,50.63 J3.5 ; J3.5 64.06,51.52 ; J3.5 62.28,51.52 ; J3.5 63.17,52.41 ; 78.79,38.82 J9.1 ; J9.1 79.68,37.93 ; J9.1 80.57,38.82 ; J9.1 79.68,39.71 ; 45.39,12.53 J10.1 ; J10.1 46.28,13.42 ; J10.1 45.39,14.31 ; J10.1 44.5,13.42 ; 52.12,6.43 J12.4 ; J12.4 53.01,5.54 ; J12.4 53.9,6.43 ; J12.4 53.01,7.33 ; C27.2 31.67,11.87 ; C27.2 32.66,10.88 ; C27.2 30.68,10.88 ; C27.2 31.67,9.89 ; 87.68,55.33 J1.12 ; J1.12 89.46,55.33 ; J1.12 88.57,54.44 ; J1.12 88.57,56.22 ; 20.24,42.91 C3.2 ; C3.2 21.23,43.9 ; C3.2 19.25,43.9 ; C3.2 20.24,44.89 ; 85.14,55.33 J1.10 ; J1.10 86.03,56.22 ; J1.10 86.92,55.33 ; J1.10 86.03,54.44 ; J11.6 61.9,9.33 ; J11.6 62.89,8.34 ; J11.6 60.91,8.34 ; C25.2 8.03,13.42 ; C25.2 6.05,13.42 ; C25.2 7.04,14.41 ; C25.2 7.04,12.43 ; 44.5,41.2 J8.4 ; J8.4 45.39,42.09 ; J8.4 45.39,40.31 ; J8.4 46.28,41.2 ; 93.65,47.35 J7.1 ; J7.1 93.65,49.34 ; J7.1 92.66,48.34 ; J7.1 94.64,48.34 ; 83.49,56.98 J1.7 ; J1.7 82.6,57.87 ; J1.7 83.49,58.76 ; J1.7 84.38,57.87
  vias: v1(2.85,54.7) v1(2.85,52.16) v1(2.85,49.61) v1(2.85,41.99) v1(2.85,39.45) v1(2.85,36.91) v1(2.85,34.38) v1(2.85,31.84) v1(2.85,29.29) v1(2.85,26.75) v1(2.85,24.21) v1(2.85,21.67) v1(2.85,19.77) v1(2.85,17.23) v1(2.85,14.69) v1(2.85,12.15) v1(2.85,9.61) v1(5.39,54.7) v1(5.39,52.16) v1(5.39,49.61) v1(5.39,41.99) v1(5.39,39.45) v1(5.39,36.91) v1(5.39,34.38) v1(5.39,31.84) v1(5.39,29.29) v1(5.39,26.75) v1(5.39,24.21) v1(5.39,21.67) v1(5.39,19.77) v1(5.39,17.23) v1(5.39,14.69) v1(5.39,12.15) v1(5.39,9.61) v1(7.93,59.77) v1(7.93,57.23) v1(7.93,54.7) v1(7.93,29.29) v1(7.93,26.75) v1(7.93,24.21) v1(7.93,21.67) v1(8.56,3.89) v1(10.47,59.77) v1(10.47,57.23) v1(10.47,54.7) v1(10.47,29.29) v1(10.47,26.75) v1(10.47,24.21) v1(10.47,21.67) v1(11.1,3.89) v1(13.01,59.77) v1(13.01,57.23) v1(13.01,54.7) v1(13.01,52.16) v1(13.01,49.61) v1(13.01,29.29) v1(13.01,26.75) v1(13.01,24.21) v1(13.01,21.67) v1(13.64,3.89) v1(16.18,3.89) v1(18.72,3.89) v1(19.36,17.23) v1(19.36,14.69) v1(19.36,12.15) v1(19.36,9.61) v1(21.26,3.89) v1(21.9,59.77) v1(21.9,57.23) v1(21.9,52.16) v1(21.9,49.61) v1(21.9,17.23) v1(21.9,14.69) v1(21.9,12.15) v1(21.9,9.61) v1(22.53,28.02) v1(23.8,3.89) v1(24.44,59.77) v1(24.44,57.23) v1(24.44,52.16) v1(24.44,49.61) v1(24.44,17.23) v1(24.44,14.69) v1(24.44,12.15) v1(24.44,9.61) v1(25.07,28.02) v1(26.34,3.89) v1(26.98,59.77) v1(26.98,57.23) v1(26.98,52.16) v1(26.98,49.61) v1(26.98,17.23) v1(27.61,38.19) v1(27.61,35.64) v1(27.61,33.1) v1(27.61,30.56) v1(27.61,25.48) v1(27.61,23.58) v1(27.61,21.04) v1(28.88,3.89) v1(30.15,38.19) v1(30.15,35.64) v1(30.15,33.1) v1(30.15,28.02) v1(30.15,25.48) v1(30.15,23.58) v1(30.15,21.04) v1(30.79,14.69) v1(30.79,12.15) v1(30.79,9.61) v1(30.79,7.07) v1(31.42,3.89) v1(32.69,35.64) v1(32.69,33.1) v1(32.69,28.02) v1(32.69,25.48) v1(33.33,14.69) v1(33.33,12.15) v1(33.33,9.61) v1(33.33,7.07) v1(35.23,35.64) v1(35.23,33.1) v1(35.23,28.02) v1(35.23,25.48) v1(35.87,14.69) v1(35.87,12.15) v1(35.87,7.07) v1(40.31,32.47) v1(40.31,29.93) v1(42.22,3.89) v1(42.85,32.47) v1(42.85,29.93) v1(44.76,3.89) v1(47.3,3.89) v1(49.84,3.89) v1(52.38,3.89) v1(59.36,3.89) v1(61.9,3.89) v1(63.17,18.5) v1(63.17,17.23) v1(64.44,19.52) v1(64.44,18.5) v1(64.44,17.23) v1(64.44,3.89) v1(65.71,18.5) v1(65.71,17.23) v1(66.98,3.89) v1(69.52,3.89) v1(75.87,24.85) v1(75.87,22.31) v1(75.87,19.77) v1(78.41,24.85) v1(78.41,22.31) v1(78.41,19.77) v1(80.95,24.85) v1(80.95,22.31) v1(80.95,19.77) v1(83.49,24.85) v1(83.49,22.31) v1(83.49,19.77) v1(86.03,24.85) v1(86.03,22.31) v1(86.03,19.77) v1(88.57,24.85) v1(88.57,22.31) v1(88.57,19.77) v1(89.21,54.06) v1(89.21,51.52) v1(89.21,48.98) v1(89.21,46.44) v1(89.21,38.82) v1(89.21,36.28) v1(89.21,33.74) v1(89.21,31.2) v1(91.11,24.85) v1(91.11,22.31) v1(91.11,19.77) v1(91.75,54.06) v1(91.75,51.52) v1(91.75,48.98) v1(91.75,46.44) v1(91.75,38.82) v1(91.75,36.28) v1(91.75,33.74) v1(91.75,31.2) v1(94.28,54.06) v1(94.28,51.52) v1(94.28,38.82) v1(94.28,36.28) v1(94.28,33.74) v1(94.28,31.2)
BOOT0: length 25.1
  TOP w0.203: R16.1 v1(53.65,10.88) ; 48.72,31.18 48.72,29.77 v1(49.2,29.29)
  BOTTOM w0.203: v1(49.2,29.29) 49.2,26.75 49.75,26.21 49.75,20.49 51.88,18.36 51.88,12.01 53.01,10.88 v1(53.65,10.88)
BOOT1: length 18.6
  TOP w0.203: U5.28 52.22,17.4 52.46,17.16 52.46,17.14 52.71,16.89 v1(52.71,16.01) ; v1(54.28,9.61) 54.28,4.11 55.13,3.26 R17.2
  BOTTOM w0.203: v1(54.28,9.61) 54.28,14.45 v1(52.71,16.01)
MPU_INT: length 40.1
  TOP w0.203: R4.2 67.62,45.8 68.25,45.17 68.25,38.65 64.61,35.01 v1(61.27,35.01) ; U5.8 47.01,25.73 47.26,25.48 v1(47.93,25.48)
  BOTTOM w0.203: v1(61.27,35.01) 60.63,34.38 52.38,34.38 47.93,29.93 v1(47.93,25.48)
MPU_SCL: length 13.3
  TOP w0.203: U2.23 58.32,39.98 58.2,40.09 R9.2 57.65,39.94 57.01,39.3 55.87,39.3 55.36,38.79 55.36,38 53.56,36.19 53.56,35.48 53.22,35.14 53.22,31.18
MPU_SDA: length 11.4
  TOP w0.203: 53.72,31.18 53.72,34.11 57.65,38.03 R11.2 57.65,38.9 58.22,39.48 U2.24
NRF_CE: length 28.7
  TOP w0.203: J9.3 77.78,34.38 70.73,34.38 62.85,26.5 62.85,25.73 61.86,24.73 U5.39
NRF_CSN: length 31.9
  TOP w0.203: J9.4 81.22,37.28 78.78,37.28 77.14,35.64 71.42,35.64 62.45,26.67 62.45,26.35 62.45,25.89 61.79,25.23 U5.40
NRF_IRQ: length 30.6
  TOP w0.203: U5.33 65.14,21.73 73.33,29.93 74.43,29.93 75.22,30.72 77.79,30.72 78.58,29.93 80.95,29.93 J9.8
NRF_MISO: length 27
  TOP w0.203: U5.35 63.61,22.73 72.08,31.2 J9.7
NRF_MOSI: length 30.4
  TOP w0.203: U5.36 63.54,23.23 72.77,32.47 80.95,32.47 J9.6
NRF_SCK: length 28.3
  TOP w0.203: U5.34 64.37,22.23 v1(72.7,30.56)
  BOTTOM w0.203: v1(72.7,30.56) 76.5,30.56 J9.5
O1: length 26.9
  TOP w0.381: U1.2 U1.1 58.47,45.55 61.9,48.98 63.17,48.98 J3.6
O2: length 18.9
  TOP w0.381: U1.6 U1.5 39.38,46.61 40.48,47.71 51.74,47.71 53.01,48.98 J3.1
O3: length 11.1
  TOP w0.381: U1.8 U1.7 38.08,46.75 40.31,48.98 42.85,48.98 J2.6
O4: length 7.5
  TOP w0.381: J2.1 34.83,49.38 U1.12 U1.11
OLED_D/C: length 11.7
  TOP w0.203: J10.6 58.09,14.35 56.97,15.47 52.38,15.47 52.06,15.78 52.06,16.99 51.72,17.33 U5.27
OLED_RST: length 9.8
  TOP w0.203: J10.5 55.55,14.35 54.84,15.06 52.01,15.06 51.65,15.41 51.65,16.82 51.22,17.25 U5.26
OLED_SCL: length 7.1
  TOP w0.203: J10.3 49.11,14.78 49.11,16.68 48.72,17.07 U5.21
OLED_SDA: length 8.4
  TOP w0.203: U5.23 49.72,15.59 51.89,13.42 J10.4
OSC_IN: length 10.6
  TOP w0.203: 37.26,29.55 37.26,28.97 37.14,28.84 R12.1 ; 37.26,29.55 38.31,28.5 U4.1 40.66,28.5 41.93,27.23 U5.5 ; 37.26,29.55 C16.1
OSC_OUT: length 10.8
  TOP w0.203: U5.6 42.59,26.73 40.66,24.8 U4.2 38.1,24.8 37.26,23.96 ; 37.26,23.96 C18.1 ; 37.26,23.96 37.26,24.54 37.14,24.67 R12.2
PA0_TIM2CH1: length 37.5
  TOP w0.203: U5.14 50.26,22.73 v1(51.11,23.58) ; v1(57.46,33.74) 57.46,34.46 58.09,35.1 v1(58.09,35.64)
  BOTTOM w0.203: v1(58.09,35.64) J3.3 ; v1(57.46,33.74) 57.46,29.93 v1(51.11,23.58)
PA1_TIM2CH2: length 39.5
  TOP w0.203: U5.15 51.03,22.23 v1(51.74,22.95) ; v1(58.22,33.74) 58.85,34.37 v1(58.85,35.64)
  BOTTOM w0.203: J3.4 58.85,49.74 v1(58.85,35.64) ; v1(51.74,22.95) 58.22,29.42 58.22,30.69 58.22,30.69 v1(58.22,33.74)
PA4_BATVAL: length 55.4
  TOP w0.203: R2.2 R8.1 25.15,42.19 25.17,42.16 C8.1 29.35,42.16 30.62,42.16 31.27,41.51 31.27,39.61 32.06,38.82 32.06,23.58 v1(32.69,22.95) ; v1(48.57,15.96) 48.22,16.3 U5.20
  BOTTOM w0.203: v1(48.57,15.96) 34.59,15.96 32.69,17.86 v1(32.69,22.95)
PA6: length 35.2
  TOP w0.203: J13.1 70.16,7.07 65.53,11.69 62.36,11.69 v1(60.63,13.42) ; v1(52.38,21.67) 50.13,21.67 49.22,20.76 U5.22
  BOTTOM w0.203: v1(52.38,21.67) 52.38,19.77 56.19,15.96 58.09,15.96 v1(60.63,13.42)
PA8: length 57.9
  TOP w0.203: v1(61.9,26.12) 61.35,26.12 60.97,25.73 U5.41
  BOTTOM w0.203: v1(61.9,26.12) 62.62,25.4 63.4,25.4 63.72,25.08 63.72,25.05 70.27,18.5 82.93,18.5 90.39,11.04 90.39,6.32 90.07,6 90.07,4.03 89.15,3.12 88.82,3.12 82.36,3.12 J13.6
PA11_LED2: length 29.5
  TOP w0.203: U5.44 60.52,27.23 61.17,27.89 61.2,27.89 75.94,42.63 D3.1
PA12_LED1: length 30.8
  TOP w0.203: U5.45 60.44,27.73 61,28.29 61,28.29 61.9,29.19 61.9,29.93 77.14,45.17 D2.1
PB3_ECHO: length 11.4
  TOP w0.203: 51.22,31.18 51.22,34.26 50.79,34.69 50.79,38.34 J8.3
PB4_PWMA: length 17.4
  TOP w0.203: 50.72,31.18 50.72,34.12 50.38,34.46 50.38,36.37 49.2,37.55 45.39,37.55 44.12,36.28 41.58,36.28 41.33,36.53 U1.23
PB5_PWMB: length 21
  TOP w0.203: 50.22,31.18 50.22,33.72 v1(48.48,35.46) ; U1.15 36.13,36.72 38.88,33.97 45.25,33.97 45.48,33.74 v1(46.03,33.74)
  BOTTOM w0.203: v1(46.03,33.74) 46.76,33.74 v1(48.48,35.46)
PB6_TIM4CH1: length 27.1
  TOP w0.203: 49.72,31.18 49.72,33.44 47.93,35.23 47.93,35.99 47.73,36.19 46.57,36.19 v1(46.03,35.64)
  BOTTOM w0.203: v1(46.03,35.64) 43.48,38.19 43.48,43.27 37.77,48.98 J2.3
PB7_TIM4CH2: length 24
  TOP w0.203: v1(47.29,35.55) 47.29,35.01 49.22,33.08 49.22,31.18
  BOTTOM w0.203: J2.4 40.31,48.98 43.89,45.4 43.89,39.68 47.29,36.29 v1(47.29,35.55)
PB8_BIN1: length 16.2
  TOP w0.203: U1.17 37.43,36.62 39.22,34.83 46.89,34.83 48.22,33.5 48.22,31.18
PB9_BIN2: length 16.3
  TOP w0.203: 47.72,31.18 47.72,33.43 46.77,34.38 39.05,34.38 36.78,36.64 U1.16
PC1: length 54.9
  TOP w0.203: U5.9 46.28,25.23 46.66,24.85 49.34,24.85 49.75,25.26 49.75,26.03 v1(50.47,26.75)
  BOTTOM w0.203: v1(50.47,26.75) 50.47,24.29 50.15,23.97 50.15,20.72 56.82,14.05 56.82,13.27 57.71,12.38 81.99,12.38 83.49,10.88 J13.7
PC2: length 58
  TOP w0.203: U5.10 46.14,24.73 46.44,24.44 49.5,24.44 50.15,25.09 50.15,25.48 50.79,26.12 v1(51.11,26.12)
  BOTTOM w0.203: v1(51.11,26.12) 51.11,24.35 50.56,23.81 50.56,20.95 56.19,15.32 57.61,15.32 60.15,12.79 82.86,12.79 84.76,10.88 84.76,5.8 J13.8
PC3: length 53.4
  TOP w0.203: v1(53.01,22.95) 53.01,23.58 52.38,24.21 50.97,24.21 50.33,23.58 46.48,23.58 45.82,24.23 U5.11
  BOTTOM w0.203: J13.9 86.03,10.88 80.31,16.59 56.19,16.59 53.01,19.77 v1(53.01,22.95)
PC4: length 35.1
  TOP w0.203: U5.24 50.22,15.67 51.23,14.65 53.68,14.65 54.28,14.05 54.28,12.79 54.92,12.15 58.09,12.15 59.36,10.88 65.08,10.88 71.43,4.53 J13.2
PC5: length 40.7
  TOP w0.203: U5.25 50.72,16.98 v1(51.11,16.59) ; v1(60.63,11.52) 61.9,11.52 62.13,11.29 65.3,11.29 70.79,5.8 76.02,5.8 77.29,7.07 J13.3
  BOTTOM w0.203: v1(60.63,11.52) 58.73,9.61 56.19,9.61 55.55,8.97 53.65,8.97 51.47,11.15 51.47,14.32 51.11,14.69 v1(51.11,16.59)
PC6: length 62.4
  TOP w0.203: U5.37 63.33,23.73 64.44,24.85 v1(64.44,25.48)
  BOTTOM w0.203: v1(64.44,25.48) 70.79,19.13 82.87,19.13 90.79,11.21 90.79,6.15 90.47,5.83 90.47,3.86 89.32,2.71 88.65,2.71 80.23,2.71 J13.4
PC7: length 58.2
  TOP w0.203: U5.38 62.56,24.23 v1(63.17,24.85)
  BOTTOM w0.203: v1(63.17,24.85) 70.16,17.86 82.98,17.86 89.98,10.86 89.98,6.49 89.66,6.17 89.66,4.2 88.99,3.53 82.59,3.53 82.22,3.89 82.22,5.8 J13.5
PC11_AIN2: length 20.1
  TOP w0.203: U1.22 40.68,36.55 41.58,35.64 44.06,35.64 45.51,37.09 48.39,37.09 v1(49.2,36.28) ; 52.72,31.18 52.72,35.39 52.38,35.73 v1(52.38,36.28)
  BOTTOM w0.203: v1(52.38,36.28) v1(49.2,36.28)
PC12_AIN1: length 19.8
  TOP w0.203: v1(51.74,35.64) 52.22,35.16 52.22,31.18 ; v1(49.84,35.64) 49.06,35.64 48.11,36.6 45.59,36.6 44.23,35.24 41.35,35.24 40.03,36.56 U1.21
  BOTTOM w0.203: v1(51.74,35.64) v1(49.84,35.64)
PC13: length 61.2
  TOP w0.203: v1(86.67,10.25) 80.48,10.25 80.29,10.06 72.13,10.06 68.89,13.3 68.89,17.86 65.47,21.28 55.29,21.28 54.92,21.66 54.92,22.29 54.92,22.96 54.23,23.65 54.23,24.9 54.23,26.33 53.18,27.38 53.18,27.4 52.46,28.11 51.02,28.11 50.4,28.73 U5.2
  BOTTOM w0.203: J13.10 87.3,5.8 87.3,9.61 v1(86.67,10.25)
PC14: length 59.5
  TOP w0.203: v1(87.94,10.25) 87.34,9.65 71.96,9.65 68.25,13.36 68.25,17.86 65.24,20.87 55.46,20.87 55.13,20.87 54.75,21.25 54.51,21.49 54.51,22.46 54.51,22.79 53.82,23.48 53.82,23.86 53.82,26.16 52.77,27.21 52.77,27.23 52.3,27.71 50.85,27.71 50.32,28.23 U5.3
  BOTTOM w0.203: v1(87.94,10.25) 88.57,9.61 J13.11
PC15: length 63.7
  TOP w0.203: U5.4 50.25,27.73 50.68,27.3 52.11,27.3 53.42,26 53.42,23.69 53.42,23.31 54.1,22.63 54.1,21.32 54.96,20.47 55.1,20.32 65.16,20.32 67.62,17.86 67.62,13.42 71.79,9.24 88.2,9.24 v1(89.21,10.25)
  BOTTOM w0.203: J13.12 88.57,5.65 89.57,6.65 89.57,8.61 89.21,8.97 v1(89.21,10.25)
PD2_TRIG: length 10.5
  TOP w0.203: 51.72,31.18 51.72,34.39 51.19,34.92 51.19,40.48 J8.2
RESET: length 34.2
  TOP w0.203: C26.1 41.58,12.62 R14.1 41.43,12.59 40.66,11.82 U8.1 ; v1(49.2,25.48) 48.45,26.23 U5.7
  BOTTOM w0.203: U8.1 46.73,10.32 49.2,12.79 v1(49.2,25.48)
SWCLK: length 37
  TOP w0.203: 54.22,31.18 54.6,31.18 55.88,32.47 58.09,32.47 59.36,33.74 64.44,33.74 66.98,36.28 66.98,36.81 68.89,38.71 68.89,41.36 75.87,48.34 77.14,48.34 79.05,50.25 79.68,50.25 J5.2
SWDIO: length 38.5
  TOP w0.203: J5.3 81.6,49.63 79.06,49.63 71.43,41.99 71.43,40.09 61.49,30.16 61.49,29.36 60.83,28.7 60.83,28.7 60.37,28.23 U5.46
USART1_RX: length 45.4
  TOP w0.203: J7.2 88.98,41.13 77.61,41.13 74.43,37.96 71.84,37.96 61.37,27.48 61.34,27.48 60.55,26.69 57.29,26.69 57.25,26.73 U5.43
USART1_TX: length 44.5
  TOP w0.203: U5.42 57.25,26.23 57.29,26.28 60.71,26.28 61.51,27.07 61.53,27.07 72.01,37.55 74.6,37.55 77.78,40.73 91.11,40.73 J7.3
USART2_RX: length 20.4
  TOP w0.203: U5.17 46.03,20.47 45.74,20.47 45.57,20.3 45.57,19.45 45.1,18.98 44.25,18.98 43.48,18.21 43.48,12.09 47.87,7.7 49.2,7.7 J12.3
USART2_TX: length 19.1
  TOP w0.203: U5.16 45.46,21.05 45.46,20.76 45.29,20.59 44.44,20.59 43.97,20.12 43.97,19.27 43.08,18.38 43.08,11.92 47.93,7.07 J12.2
USART3_RX: length 66.6
  TOP w0.203: U5.30 53.17,19.74 53.17,18.91 53.17,18.91 53.17,17.64 54.45,16.37 60.3,16.37 v2(61.34,15.32) ; v2(63.81,15.32) 65.08,14.05 65.77,14.05 71.4,8.43 92.41,8.43 95.96,11.98 95.96,17.4 93.85,19.51 93.85,25.32 94.4,25.87 U6.1
  BOTTOM w0.203: v2(63.81,15.32) v2(61.34,15.32)
USART3_TX: length 67.1
  TOP w0.203: U5.29 52.77,19.74 52.77,17.47 54.28,15.96 59.36,15.96 v2(60,15.32) ; v2(65.15,15.41) 66.06,14.49 66.06,14.34 71.56,8.84 92.24,8.84 95.56,12.15 95.56,17.23 93.44,19.34 93.44,25.32 92.9,25.87 U6.2
  BOTTOM w0.203: v2(65.15,15.41) 65.15,15.32 64.42,14.59 61.04,14.59 60.61,15.02 60.61,15.05 60.34,15.32 v2(60,15.32)
N02945: length 1
  TOP w0.254: F1.2 28.54,15.62
N04107: length 2.6
  TOP w0.203: R15.1 79.68,13.03 79.4,13.31 U6.24
N04150: length 2.5
  TOP w0.203: D5.2 78.14,11.52 78.97,10.69 R15.2
N05925: length 2.9
  TOP w0.203: 64.89,41.99 64.89,41.28 64.08,40.48 U2.9
N05988: length 4
  TOP w0.203: U2.10 63.54,40.98 64.25,41.68 64.25,43.11 64.91,43.77 C6.1
N06085: length 4.1
  TOP w0.203: 64.89,40.09 64.77,39.98 63.83,39.98 ; C10.1 64.91,38.9 63.83,39.98 ; 63.83,39.98 U2.8
N06193: length 3.5
  TOP w0.203: 62.52,42.52 62.52,43.32 62.07,43.77 C5.1 62.07,44.61 62.09,44.64 R3.1
N06468: length 4.9
  TOP w0.203: U2.12 63.6,41.98 63.81,42.18 63.81,44.01 64.89,45.09 64.89,45.8
N06759: length 2.1
  TOP w0.203: U2.20 58.99,41.48 58.47,41.99 C7.2
N13789: length 3.3
  TOP w0.203: J11.4 57.65,10.05 R16.2
N13793: length 3.3
  TOP w0.203: J11.3 57.65,4.09 R17.1
N14492: length 10.6
  TOP w0.203: 37.14,18.5 R13.1
  TOP w0.254: U5.13 43.79,23.23 42.85,22.29 42.85,20.8 42.29,20.24 C20.1 39.84,20.24 C19.1 37.77,18.5 R13.1
N14997: length 6.5
  TOP w0.203: C23.1 55.3,17.23 53.72,18.81 U5.31
N15072: length 2.6
  TOP w0.203: C17.1 57.98,29.29 57.42,28.73 U5.47
N21101: length 2.6
  TOP w0.203: D1.2 R1.2
N21105: length 2.6
  TOP w0.203: D2.2 R5.2
N21109: length 2.6
  TOP w0.203: D3.2 R6.2

## Copper pours and planes (outline as drawn; the poured copper is in the pictures)
3V3 on TOP (solid shape): 46.44,30.31 48.36,30.31 48.36,29.63 48.63,29.36 48.63,29.28 48.63,29.2 48.53,29.09 45.65,29.09 45.65,29.51 44.5,29.51 44.5,30.82 46.44,30.82
3V3 on TOP (solid shape): 54.95,19.97 58.98,19.97 58.98,19.84 58.87,19.74 58.81,19.75 58.31,19.75 58.14,19.68 58.08,19.52 58.08,18.75 58.14,18.59 58.31,18.52 58.81,18.52 58.87,18.53 58.98,18.43 58.98,17.94 58.87,17.84 58.81,17.84 58.31,17.84 58.15,17.78 58.08,17.64 58.07,17.59 55.44,17.59 54.2,18.83 54.23,18.91 54.5,18.91 54.5,20.31 54.58,20.35
3V3 on TOP (solid shape): outline of 235 points within 49.08,23.17 64.14,33.38
3V3 on TOP (solid shape): outline of 272 points within 82.86,41.49 86.92,51.06
3V3 on TOP (solid shape): outline of 349 points within 29.26,6.18 47.25,20.66
3V3 on TOP (solid shape): outline of 360 points within 76.15,29.04 86.92,40.37
3V3 on TOP (solid shape): outline of 376 points within 57.2,34.1 67.89,43.52
3V3 on TOP (solid shape): outline of 622 points within 43.84,6.18 58.98,19.99
5V on TOP (solid shape): 7.93,31.2 20.63,31.2 20.63,22.95 25.71,22.95 25.71,18.5 16.18,18.5 16.18,10.88 11.1,10.88 11.1,7.07 9.2,7.07 9.2,19.77 15.55,19.77 15.55,30.56 6.66,30.56 6.66,36.91 7.93,36.91
5V on TOP (solid shape): outline of 429 points within 31.8,49.36 74.22,56.22
12V on TOP (solid shape): 77.14,55.33 76.5,54.7 74.6,54.7 74.6,57.23 30.79,57.23 30.79,48.34 33.33,48.34 33.33,44.53 42.22,44.53 42.22,41.99 35.23,41.99 35.23,38.82 32.69,38.82 32.06,39.45 32.06,47.08 18.09,47.08 18.09,34.38 12.37,34.38 12.37,36.91 13.64,36.91 13.64,41.36 10.47,41.36 10.47,40.73 6.66,40.73 6.66,43.27 13.64,43.27 13.64,45.8 16.18,45.8 16.18,48.34 28.88,48.34 28.88,59.14 77.14,59.14
GND on TOP (solid shape): 53.65,2.62 42.85,2.62 42.85,5.16 53.65,5.16
GND on TOP (solid shape): 76.43,27.26 75.97,26.55 75.52,27.95 75.55,28.09 75.67,28.17 76.7,28.17
GND on TOP (solid shape): 5.39,40.09 13.01,40.09 13.01,37.55 9.83,37.55 9.83,33.1 8.56,33.1 8.56,37.55 6.02,37.55 6.02,29.93 14.28,29.93 14.28,21.04 7.93,21.04 7.93,7.07 7.29,7.07 7.29,7.7 2.2,7.7 2.2,43.27 5.39,43.27
GND on TOP (solid shape): 38.41,13.42 35.23,13.42 35.23,11.52 38.41,11.52 38.41,5.16 34.59,5.16 34.59,2.62 7.93,2.62 7.93,5.16 11.73,5.16 11.73,10.25 15.55,10.25 15.55,5.16 30.15,5.16 30.15,15.32 38.41,15.32
GND on TOP (solid shape): 81.84,49.25 81.84,48.59 81.69,48.49 81.66,48.5 81.62,48.52 81.57,48.52 81.01,48.52 80.87,48.47 80.79,48.34 80.31,48.34 80.31,47.08 79.05,47.08 79.05,48.98 80.31,48.98 80.31,49.27 81.74,49.27 81.76,49.29
GND on TOP (solid shape): 42.12,51.14 42.85,50.69 43.58,51.14 44.27,51.14 44.3,51.06 42.67,49.42 40.13,49.42 39.5,48.8 39.42,48.83 39.42,50.8 39.61,50.87 39.64,50.84 40.49,50.58 41.18,51.14
GND on TOP (solid shape): 67.26,17.72 67.26,13.75 67.18,13.72 66.41,14.49 66.41,14.64 65.87,15.18 65.88,15.22 65.48,16.09 64.54,15.87 64.52,15.85 64.37,15.84 64.35,15.86 63.76,16.09 63.21,15.8 63.18,15.76 62.98,15.83 62.98,17.51 62.54,18.44 62.09,17.51 62.09,15.92 61.91,15.84 61.87,15.87 61.54,16.06 61.15,16.06 61.12,16.05 60.53,16.64 60.58,16.69 60.63,16.76 60.64,16.85 60.64,17.61 60.58,17.77 60.41,17.84 59.91,17.84 59.85,17.84 59.74,17.94 59.74,18.43 59.85,18.53 59.91,18.52 60.41,18.52 60.58,18.59 60.64,18.75 60.64,19.52 60.58,19.68 60.41,19.75 59.91,19.75 59.85,19.74 59.74,19.84 59.74,19.97 65.01,19.97
GND on TOP (solid shape): outline of 192 points within 40.3,45.99 64.62,51.14
GND on TOP (solid shape): outline of 101 points within 59.78,44.28 78.41,52.35
GND on TOP (solid shape): outline of 472 points within 41.69,35.52 60.02,46.4
GND on TOP (solid shape): outline of 865 points within 16.56,8.72 46.34,46.06
GND on TOP (solid shape): outline of 1252 points within 2.2,9.19 96.2,60.2
GND on BOTTOM: 85.31,6.45 85.12,6.37 85.12,5.65 84.76,5.3 84.76,11.38 85.12,11.03 85.12,7.77 85.31,7.69 85.34,7.72 85.49,7.86 85.67,7.96 85.67,10.73 84.76,11.65 84.76,12.15 96.19,12.15 96.19,17.86 70.79,17.86 70.79,16.24 65.64,16.24 65.57,16.04 65.61,16.01 65.85,15.1 65.02,14.65 64.99,14.66 64.57,14.23 60.89,14.23 60.43,14.7 60.39,14.67 60.31,14.63 60.22,14.6 60.19,14.59 60.14,14.41 60.56,13.99 60.59,13.99 61.06,13.79 61.19,13.3 61.18,13.27 61.28,13.14 70.79,13.14 70.79,2.2 2.21,2.2 2.21,60.2 96.2,60.2 96.2,2.2 84.76,2.2 84.76,3.88 85.12,3.88 85.21,4.04 85.19,4.07 85.31,5.15 86.37,5.42 86.41,5.41 86.94,5.95 86.94,6.37 86.75,6.45 86.72,6.42 86.03,6.12 85.34,6.42 ; 12 cut-outs
VBAT on TOP (solid shape): 20.63,49.61 15.55,49.61 15.55,46.44 13.01,46.44 13.01,44.53 2.21,44.53 2.21,48.34 14.28,48.34 14.28,58.5 20.63,58.5
N02049 on TOP (solid shape): 23.17,33.1 25.71,33.1 25.71,29.29 21.9,29.29 21.9,31.84 10.47,31.84 10.47,36.91 11.73,36.91 11.73,32.47 13.64,32.47 13.64,33.74 18.72,33.74 18.72,35.64 20.63,35.64 20.63,38.19 23.17,38.19
N02945 on TOP (solid shape): 29.52,5.8 16.82,5.8 16.82,15.32 18.72,15.32 18.72,8.34 26.34,8.34 26.34,15.96 29.52,15.96
GND on TOP (solid shape): 40.94,22.31 40.97,22.2 40.94,22.1 40.4,21.63 39.63,22.2 40.4,22.78
USART2_TX on TOP (solid shape): 45.47,21.12 45.42,21.05 45.34,21.04 44.02,21.59 44.75,21.75 45.47,21.86

Small or netless copper shapes (teardrops, artwork), in the pictures only: 143 on TOP, 87 on BOTTOM

## Text on the board
Ref Des/Silkscreen Top: lm2596s-5.0 | 220uF | 10V | 104 | 33uH | Sample | BAT | SS54 | O4 | C1 | 5 | TB6612FNG | T4C1 | T4C2 | PB6 PB7 | GND O3 | G ECHO TRIG 5 | PB3 | PD2 | O2 | C4 | C2 | C7 | R9 | R11 | T2C1 | R3 | C5 | MPU6050 | R4 | R10 | T2C2 | PA0 PA1 | C6 | C10 | R7 | GND | O1 | C25 | C29 | U3 | C11 | C24 | U7 | C3 | L1 | C28 | R2 | R8C8 | F1 | D4 | C27 | C12 | OSC 8Mhz | C16 | R12 | C18 | C19 | C20 | C26 | U1 | R13 | R14 | C22 | C13 | C14 | C17 | C21 | C23 | 3v3 B0 GND | 3v3 B1 GND | OLED | UART LCD | GND 3v3 | SCL SDA | RST D/C | 3v3 TX2 | RX2 GND | PWR | LED1 | LED2 | 12V5V3v3GGGG | C15 | C4C6A8C2C13C15 | A6C5C7C1C3C14 | BlueTooth | R15 | Module | C9 | SCK MOSI | CE  CSN | MISOIRQ | PC8 PC9 | PB13PB15 | PB14PB12 | R1 | R5 | R6 | SDIO | RX1 | TX1 | SCLK | 3v3 | Close | Open
PLACE_BOUND_TOP: FIGURE | SIZE | 0.3048 | 0.6096 | 0.8 | 1.0 | 1.05 | 3.2 | 2.354x1.154 | 3.9x1.9 | DRILL CHART: TOP to BOTTOM | ALL UNITS ARE IN MILLIMETERS | PLATED | NON-PLATED | QTY | 247 | 9 | 6 | 66 | 4 | 3 | 1
